# Altium PCB shield I2C latest edit.PcbDoc
Units mm, origin at the board's own origin, x right, y up, seen from the top; angles counter-clockwise.
Board outline 250.44 x 277.75 mm, 2 copper layers (Top Layer, Bottom Layer); 10 components, 4 nets, 44 pads, 0 vias.
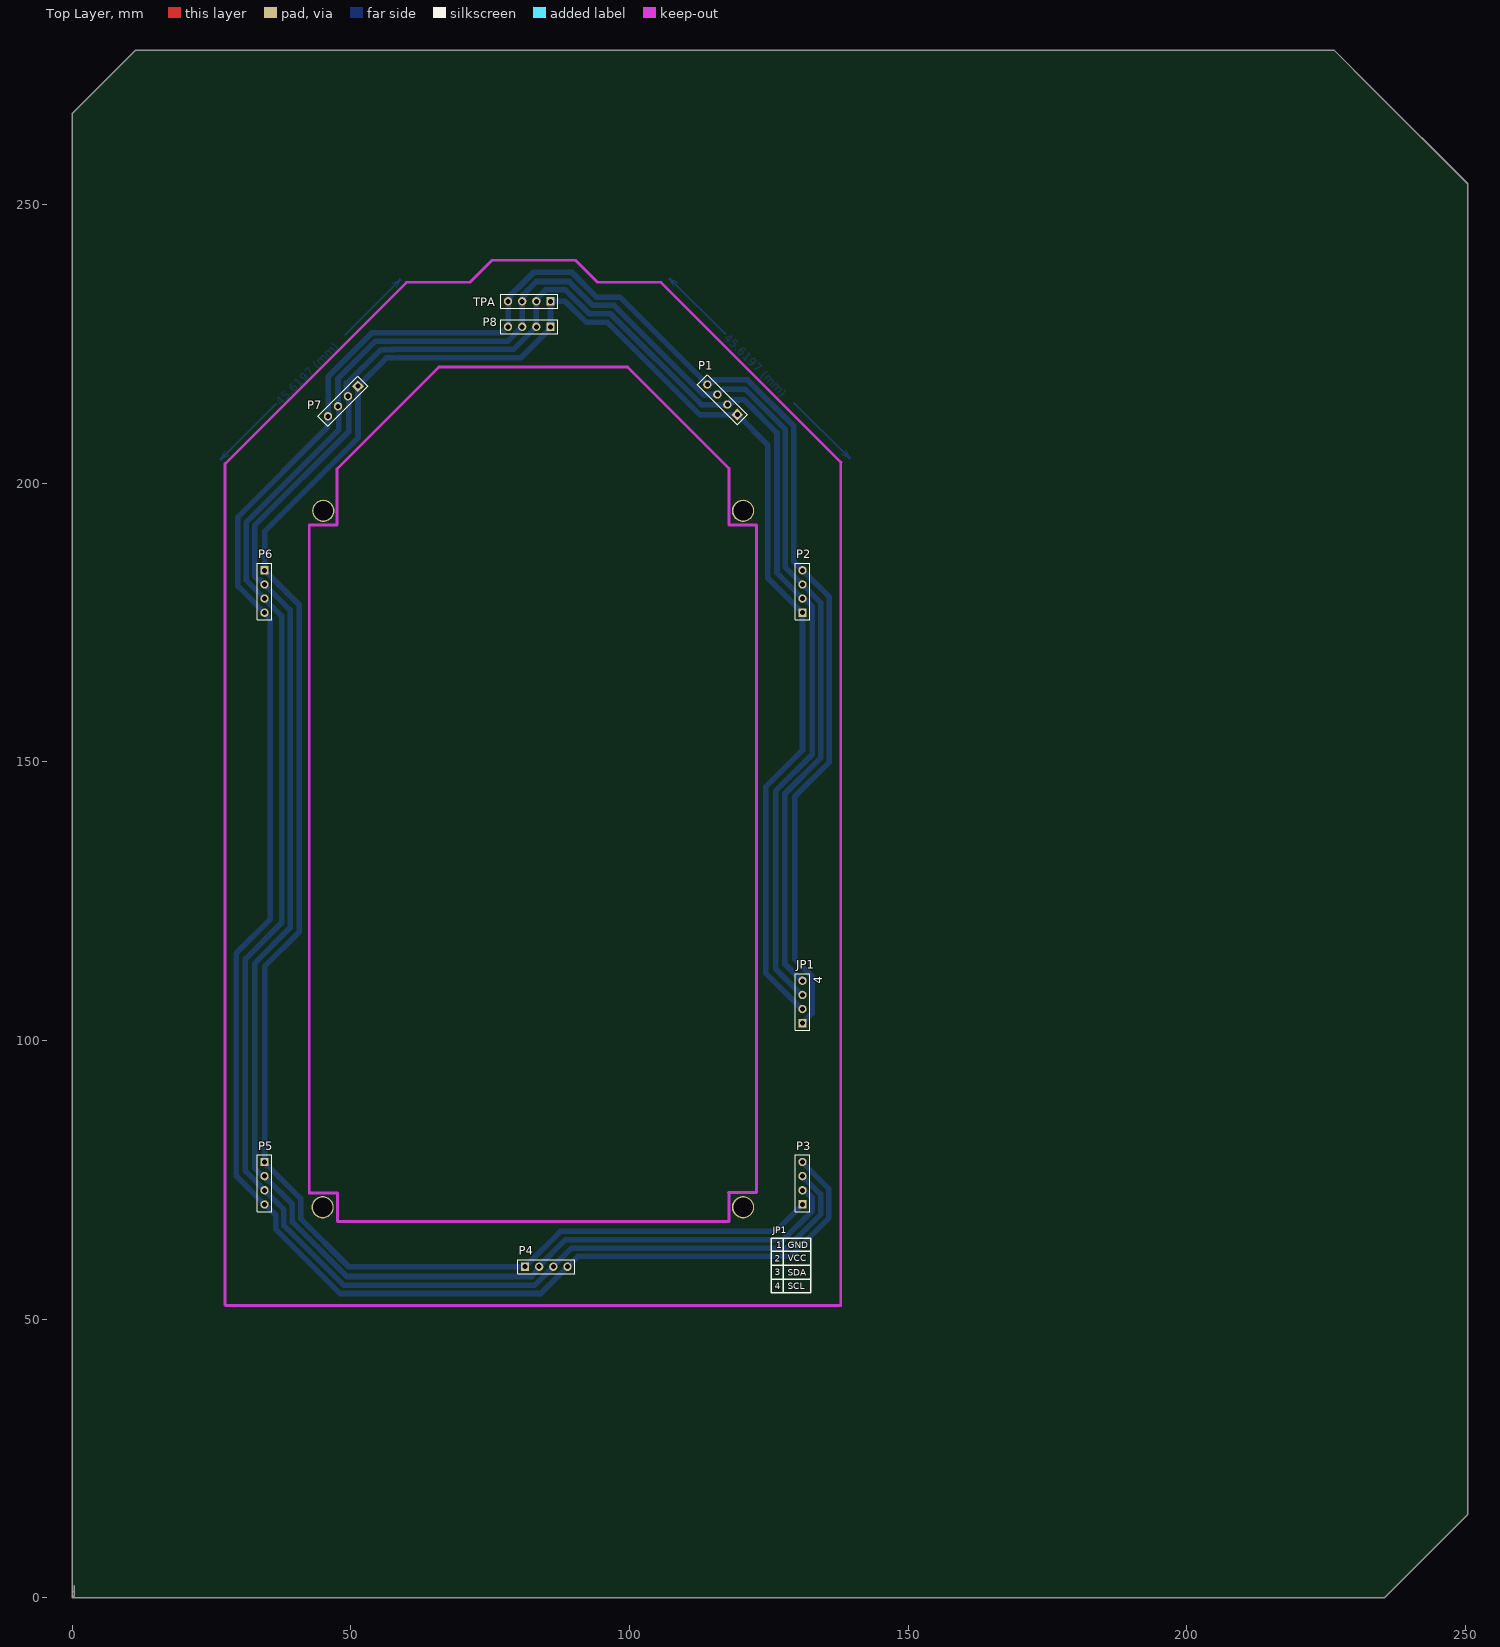
[diagram p0: Top Layer view]
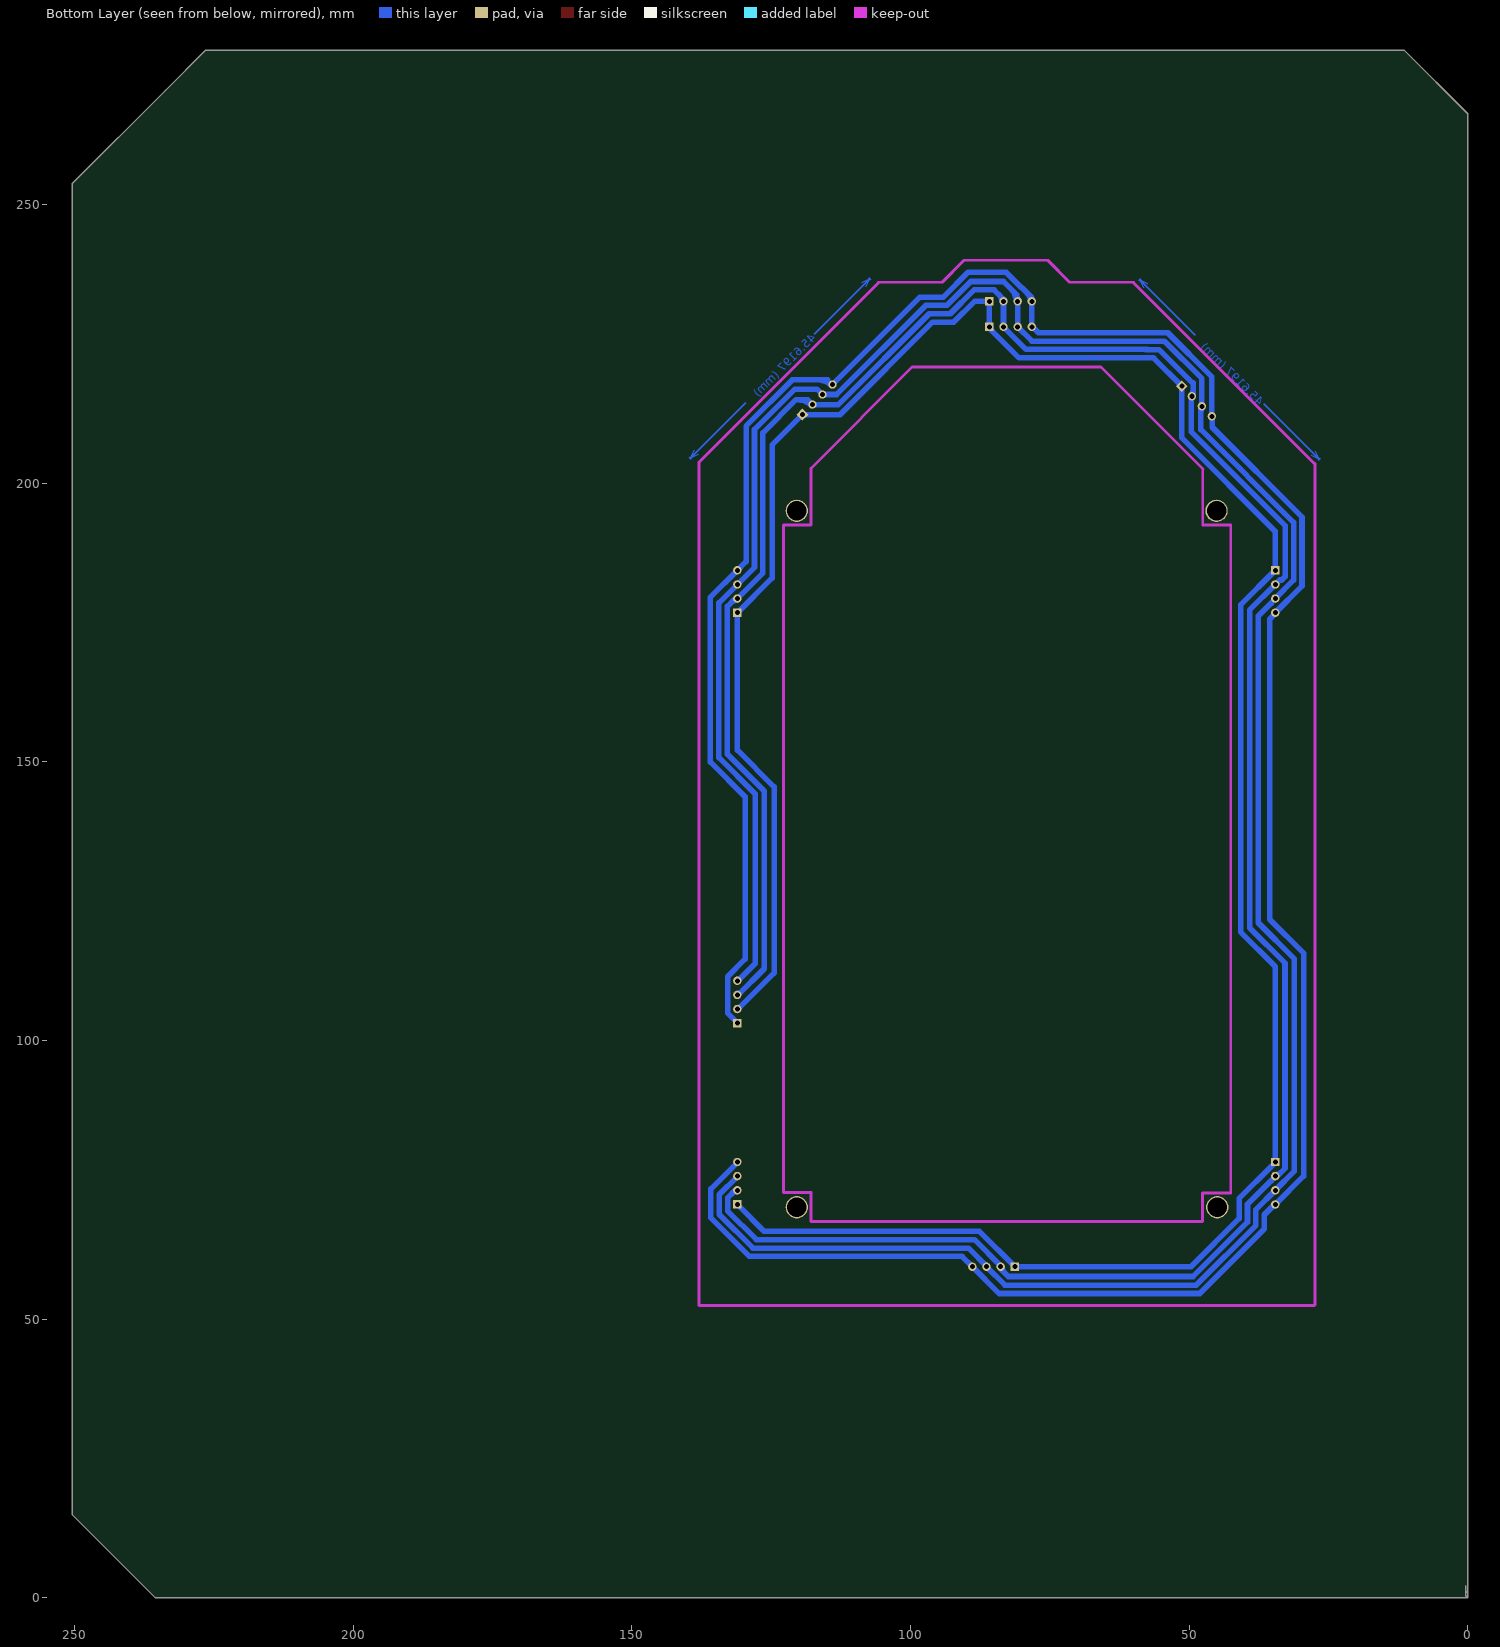
[diagram p1: Bottom Layer view, seen from below]

## Layer stack, top to bottom
Top Layer: signal copper 0.0356
Dielectric: dielectric 0.32, FR-4, Dk 4.8
Bottom Layer: signal copper 0.0356

## Board outline
0,0 235.458,0 250.444,14.986 250.444,253.746 233.68,270.51 226.441,277.749 22.86,277.749 11.43,277.749 0,266.319 0,0 0.381,0.381 0.381,2.159 0.381,1.27 0,0.889 0,0

## Design rules (kind name [scope] priority, off if disabled: settings)
Clearance [All] p1: gap=0.5
PolygonConnect [All] p1: connectstyle=Relief reliefconductorwidth=0.254 reliefentries=4 polygonreliefangle="90 Angle"
RoutingVias [All] p1: holewidth=0.711 width=1.27 viastyle="Through Hole" minholewidth=0.711 minwidth=1.27 maxholewidth=0.711 maxwidth=1.27
SilkscreenOverComponentPads [All] p1: minsilkscreentomaskgap=0.254
SolderMaskExpansion [All] p1: expansion=0.102
Width [All] p1: maxlimit=1 minlimit=1 preferedwidth=1 minimp=50.000000 maximp=50.000000 favimp=50.000000
27 further rules are at their usual default settings.

## Components (designator, comment, footprint, x,y, rotation, side; value= is the part's Value field where it differs from the comment)
JP1 "Header 4" HDR1X4 131.064,103.124 r90 top
P1 "Header 4" HDR1X4 119.38,212.344 r135 top
P2 "Header 4" HDR1X4 131.064,176.784 r90 top
P3 "Header 4" HDR1X4 131.064,70.612 r90 top
P4 "Header 4" HDR1X4 81.28,59.436 r0 top (schematic designator P5)
P5 "Header 4" HDR1X4 34.544,78.232 r270 top (schematic designator P6)
P6 "Header 4" HDR1X4 34.544,184.404 r270 top (schematic designator P7)
P7 "Header 4" HDR1X4 51.308,217.424 r225 top (schematic designator P8)
P8 "Header 4" HDR1X4 85.852,228.092 r180 top (schematic designator P9)
TPA "Header 4" HDR1X4 85.852,232.664 r180 top (schematic designator P4)

## Footprints (in the part's own frame and the unit in brackets; to place one, negate y for a bottom-side part, rotate by r counter-clockwise, add the part's x,y. Pads: shape width x height; smd on the part's side, far side on the other; paste and mask are expansions set on the pad)
HDR1X4 [mm] "Connector; Header; 4 Position"
  rect 1.5x1.5 hole 0.9: 1(0,0)
  round 1.5 hole 0.9: 2(2.54,0) 3(5.08,0) 4(7.62,0)
  silkscreen extent -1.27,-1.27 8.89,1.27

## Part data
JP1 P1 P2 P3 P4 P5 P6 P7 P8 TPA: "Header, 4-Pin"

## Free pads (board coordinates)
  round 4 hole 3.5: 0(120.396,70.104) 0(120.396,195.072) 2(44.958,70.104) 3(45.085,195.072)

## Nets (pads, with @x,y where several pads share a name; then routed paths per layer and width w, separated by ;. In a path a pad name is that pad's centre, name@x,y a point inside that pad or via, vN(x,y) a via of type N, cw(c..) or ccw(c..) an arc to the next point about the centre after c; other vN are vias at no path point)
NetJP1_1: JP1.1 P1.4 P2.4 P3.4 P4.4 P5.4 P6.4 P7.4 P8.4 TPA.4 | length 515.9
  Bottom Layer w1: P5.4@34.544,70.362 cw(c34.544,69.452) 35.188,70.095 ; P5.4 29.464,75.692 29.464,115.697 35.541,121.774 35.541,175.66 P6.4@34.544,176.657 ; P5.4@34.544,70.739 36.521,68.762 36.521,66.208 48.095,54.634 84.098,54.634 P4.4 90.75,61.286 128.895,61.286 135.814,68.205 135.814,73.417 P3.4@131.064,78.167 ; P6.4 29.742,181.586 29.742,193.953 45.847,210.058 P7.4@45.847,212.09 ; P6.4@34.794,176.784 ccw(c35.704,176.784) 35.061,176.14 ; 45.847,211.256 cw(c46.699,211.256) P7.4@46.097,211.859 ; P7.4 45.966,212.082 45.966,219.156 53.838,227.028 77.041,227.028 P8.4@78.105,228.092 ; 77.588,227.575 cw(c78.232,226.932) P8.4@78.232,227.842 ; P8.4 TPA.4 78.232,233.299 80.024,235.091 80.062,235.091 82.842,237.871 89.662,237.871 94.107,233.426 98.298,233.426 P1.4 ; TPA.4@78.482,232.664 cw(c80.619,232.664) 79.108,234.175 ; P1.4@114.169,217.555 cw(c116.611,215.113) 116.611,218.567 ; 114.827,218.567 121.21,218.567 129.492,210.285 129.492,185.976 P2.4 135.89,179.578 135.89,149.987 129.667,143.764 129.667,114.616 132.814,111.469 132.814,104.939 JP1.1@131.064,103.189
NetJP1_2: JP1.2 P1.1 P2.1 P3.1 P4.1 P5.1 P6.1 P7.1 P8.1 TPA.1 | length 467
  Bottom Layer w1: P5.1@34.417,78.232 P5.1 ; 85.246,227.232 ccw(c84.385,228.092) P8.1@85.602,228.092 ; TPA.1@85.725,232.664 TPA.1 ; P8.1 TPA.1 ; P8.1@85.979,228.092 85.979,227.965 80.518,222.504 56.388,222.504 P7.1 51.308,208.153 34.544,191.389 P6.1 40.767,178.181 40.767,119.507 34.544,113.284 P5.1 ; 130.42,106.181 ccw(c131.064,106.824) JP1.2@131.064,105.914 ; JP1.2@130.937,105.664 124.46,112.141 124.46,145.542 131.064,152.146 P2.1 124.841,183.007 124.841,206.883 P1.1 112.597,212.344 96.015,228.926 92.243,228.926 88.505,232.664 TPA.1 ; P3.1 126.238,65.786 87.63,65.786 P4.1 49.657,59.436 41.021,68.072 41.021,71.69 35.269,77.442 35.207,77.442 34.544,78.105 P5.1
NetJP1_3: JP1.3 P1.2 P2.2 P3.2 P4.2 P5.2 P6.2 P7.2 P8.2 TPA.2 | length 493.4
  Bottom Layer w1: 33.478,76.383 ccw(c34.544,77.449) P5.2@34.544,75.942 ; P6.2@34.296,181.836 ccw(c33.38,181.732) 33.38,182.654 ; P5.2 P5.2@34.417,75.692 ; P7.2@49.247,215.646 49.247,218.03 49.276,218.059 49.468,218.059 55.413,224.004 57.761,224.004 ; 49.247,216.87 ccw(c50.754,216.87) P7.2@49.689,215.805 ; P7.2@49.335,215.451 cw(c48.558,214.674) 49.657,214.674 ; P7.2@49.657,215.265 49.657,209.296 32.766,192.405 32.766,183.268 33.38,182.654 ; 57.493,224.028 79.248,224.028 83.185,227.965 P8.2@83.312,227.965 ; 83.124,58.359 ccw(c82.047,59.436) P4.2@83.57,59.436 ; P8.2 TPA.2 ; TPA.2@83.312,232.791 83.058,232.791 84.095,233.828 ; TPA.2@83.562,232.664 cw(c85.085,232.664) 84.008,233.741 ; P4.2@83.693,59.436 88.543,64.286 127.652,64.286 132.814,69.448 132.814,71.776 P3.2@131.438,73.152 ; P4.2 83.82,59.055 82.451,57.686 49.286,57.686 39.521,67.451 39.521,70.65 35.269,74.902 35.207,74.902 P5.2@34.417,75.692 ; P4.2@84.07,59.436 cw(c84.98,59.436) 84.337,60.08 ; 84.102,233.828 84.994,234.72 88.57,234.72 92.864,230.426 96.637,230.426 112.923,214.14 P1.2 118.455,215.011 120.523,215.011 126.492,209.042 126.492,183.896 P2.2 131.445,179.324 132.842,177.927 132.842,151.384 126.238,144.78 126.238,112.903 JP1.3@130.937,108.204 ; P1.2@117.761,213.963 cw(c120.29,211.434) 120.29,215.011 ; 130.42,108.721 ccw(c131.064,109.364) JP1.3@131.064,108.454 ; P3.2@131.064,72.902 cw(c131.064,71.395) 132.13,72.461 ; P2.2@131.064,179.074 cw(c131.064,177.551) 132.141,178.628 ; 33.38,182.654 33.754,182.654 P6.2 39.135,177.273 39.135,120.264 32.794,113.923 32.794,77.068 34.17,75.692 P5.2@34.417,75.692
NetJP1_4: JP1.4 P1.3 P2.3 P3.3 P4.3 P5.3 P6.3 P7.3 P8.3 TPA.3 | length 493.8
  Bottom Layer w1: P6.3 31.242,182.626 31.242,193.002 47.879,209.639 P7.3@47.879,213.741 ; 35.207,178.534 35.269,178.534 37.592,176.211 37.592,121.158 31.115,114.681 31.115,76.581 P5.3 38.021,69.675 38.021,66.829 48.716,56.134 83.058,56.134 P4.3 ; P7.3@47.539,213.655 cw(c46.719,212.835) 47.879,212.835 ; P7.3 47.716,218.785 54.459,225.528 78.208,225.528 P8.3 ; TPA.3@80.595,232.841 ccw(c79.862,233.574) 80.899,233.574 ; P8.3@80.772,228.219 TPA.3 ; TPA.3@80.899,232.664 80.899,233.807 83.312,236.22 89.192,236.22 93.486,231.926 97.258,231.926 113.248,215.936 P1.3 116.768,216.916 120.739,216.916 127.992,209.663 127.992,184.936 P2.3 134.366,178.562 134.366,150.787 127.889,144.31 127.889,113.792 130.937,110.744 JP1.4 JP1.4@131.064,110.679 ; TPA.3@81.022,232.664 cw(c84.078,232.664) 81.917,234.825 ; P4.3@86.233,59.436 89.583,62.786 128.274,62.786 134.314,68.826 134.314,72.398 P3.3@131.064,75.648 ; P4.3@86.61,59.436 cw(c87.52,59.436) 86.877,60.08 ; 130.42,111.261 ccw(c131.064,111.904) JP1.4@131.064,110.994
copper on no net: | length 71.5
  Bottom Layer w0.254: 26.464,204.496 26.823,204.137 ; 27.362,205.753 26.643,204.316 ; 28.08,205.035 26.643,204.316 ; 36.65,214.323 26.643,204.316 ; 48.895,226.568 58.901,236.574 ; 57.465,235.856 58.901,236.574 ; 58.183,235.138 58.901,236.574 ; 58.722,236.754 59.081,236.395 ; 107.109,236.575 107.468,236.934 ; 108.007,235.318 107.288,236.755 ; 108.725,236.036 107.288,236.755 ; 117.295,226.748 107.288,236.755 ; 129.54,214.503 139.546,204.497 ; 138.11,205.215 139.546,204.497 ; 138.828,205.933 139.546,204.497 ; 139.367,204.317 139.726,204.676

## Keep-outs
Keep-Out Layer:
  lines w0.5: 27.432,52.578 27.432,203.581 ; 27.462,203.484 59.944,235.966 ; 27.51,52.451 137.922,52.451 ; 42.545,72.644 42.545,192.532 47.545,192.532 47.545,202.532 ; 42.625,72.644 47.625,72.644 47.625,67.564 117.856,67.564 117.856,72.771 ; 47.514,202.549 65.818,220.853 99.695,220.853 117.856,202.692 117.856,192.532 122.809,192.532 122.809,72.771 117.809,72.771 ; 60,236.093 71.433,236.093 75.37,240.03 90.363,240.03 94.3,236.093 105.734,236.093 ; 105.791,235.966 137.986,203.772 ; 137.922,52.47 137.922,203.708

## Other copper
Bottom Layer:
  text "45.6197 (mm)" at 116.828,225.922 h1.52 r315
  text "45.6197 (mm)" at 37.476,213.856 h1.52 r45

## Silkscreen, mask and mechanical layers (free items; w line width, h text height)
Top Overlay:
  lines w0.254: 125.476,57.15 132.588,57.15 ; 125.476,59.69 132.588,59.69 ; 125.476,62.23 132.588,62.23 ; 127.635,54.737 127.635,64.516 ; 125.476,54.737 132.588,54.737 132.588,64.516 125.476,64.516 125.476,54.737
  text "4" at 134.62,110.236 h1.52 r90
  text "JP1" at 125.73,65.405 h1.2
  text "1" at 126.365,62.738 h1.2
  text "GND" at 128.397,62.738 h1.2
  text "VCC" at 128.397,60.452 h1.2
  text "2" at 126.111,60.325 h1.2
  text "3" at 126.111,57.912 h1.2
  text "SDA" at 128.397,57.785 h1.2
  text "4" at 126.111,55.372 h1.2
  text "SCL" at 128.397,55.372 h1.2

## Dimensions
75.37,240.03 to 103.124,239.776 on Keep-Out Layer
60.198,201.93 to 72.263,240.665 on Mechanical 1
105.664,210.947 to 93.599,240.538 on Mechanical 1
80.01,60.706 to 90.17,60.706 on Mechanical 1
27.51,52.451 to 84.963,59.944 on Mechanical 1
27.51,52.451 to 65.659,58.166 on Mechanical 1
40.513,197.485 to 45.085,210.312 on Mechanical 1
137.986,203.772 to 105.791,235.966 on Mechanical 1
90.363,240.03 to 94.615,220.98 on Mechanical 1
37.139,202.874 to 63.754,223.266 on Mechanical 1
33.274,79.502 to 31.877,175.895 on Mechanical 1
27.51,52.451 to 29.972,69.215 on Mechanical 1
132.334,112.014 to 130.048,175.895 on Mechanical 1
132.207,101.854 to 132.334,79.502 on Mechanical 1
137.922,52.451 to 127.127,69.215 on Mechanical 1
137.922,52.47 to 121.158,56.642 on Mechanical 1
27.432,52.578 to 44.196,58.674 on Mechanical 1
27.51,52.451 to 137.922,52.451 on Bottom Layer
137.922,203.708 to 137.922,52.47 on Bottom Layer
99.695,220.853 to 87.122,226.822 on Keep-Out Layer